# EAGLE board Temperatura y humedadALIM (EAGLE 7.6.0)
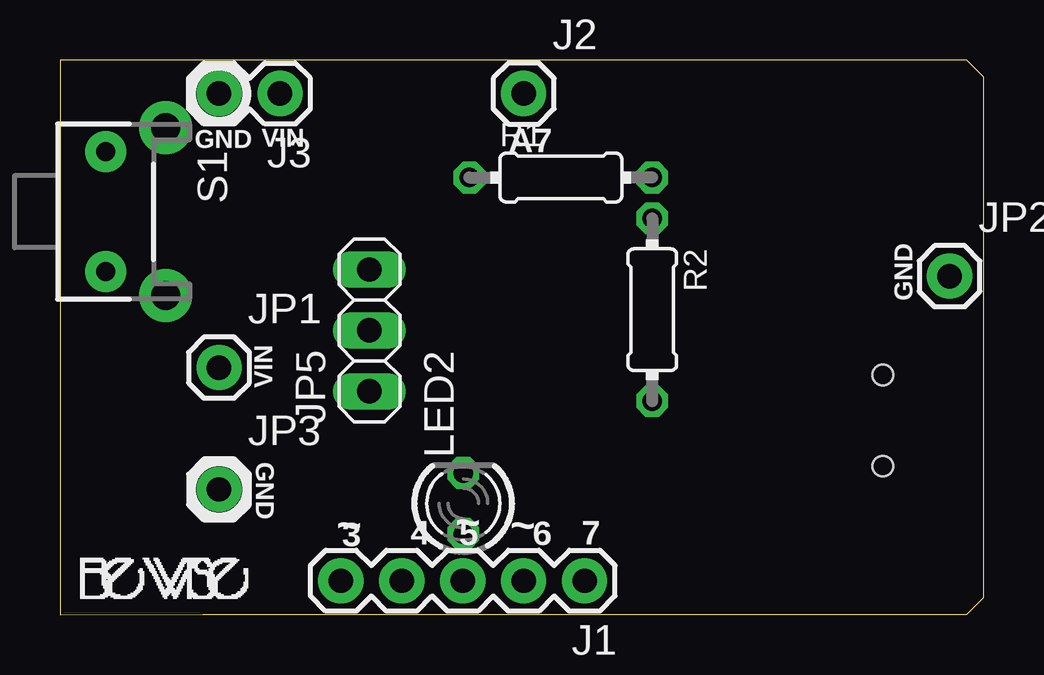
[diagram p0: board, top side]
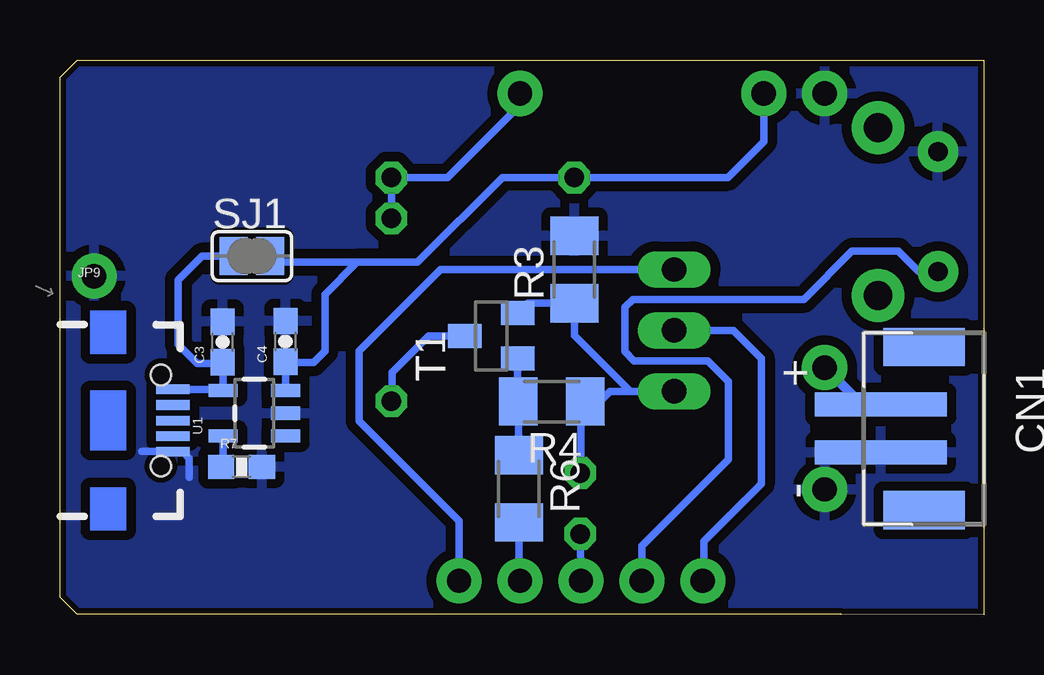
[diagram p1: board, bottom side, seen from below]

Size 38.51 x 23.14 mm. Coordinates in mm from the lower left corner, seen from the top.
Outline: 5.94,0.02 37.79,0.02 38.51,0.74 38.51,22.43 37.79,23.14 0,23.14 0,0 5.94,0.02
Copper layers (1*16): Top 0.035mm / dielectric 1.5mm / Bottom 0.035mm
Design rules "ITEADstudio_DRC *": minimum track width 6mil, minimum drill 12mil, track to track 16mil, track to pad 16mil, pad to pad 6mil, via to via 6mil, smd to smd 6mil, copper to edge 10mil, drill to drill 10mil, minimum pad ring 10mil, minimum via ring 6mil, stop-mask expansion 2mil, vias tented up to drill 100mil, thermal gap 15mil
Net classes: 1 power: width 0.381 mm, clearance 0.254 mm

## Footprints (pad centres in the part's own frame; a part is rotated, then mirrored left to right if it is on the bottom)
0603-CAP = smd 1.1 x 1: 1 -0.85,0; 2 0.85,0
JST-PH-2-SMT = smd 1 x 5.5: 1 -1,-1.8; 2 1,-1.8 | smd 1.6 x 3.4: NC1 -3.4,0; NC2 3.4,0
1X05 = drill 1.016 pad 1.88: 1 0,0; 2 2.54,0; 3 5.08,0; 4 7.62,0; 5 10.16,0
1X01 = drill 1.016 pad 1.88: 1 0,0
1X02 = drill 1.016 pad 1.88: 1 0,0; 2 2.54,0
1X03 = drill 1.016 long: 1 -2.54,0; 2 0,0; 3 2.54,0
USB-AB-MICRO-SMD_V03 = smd 1.4 x 0.4: D+1 2.7,0; D-1 2.7,0.65; GND1 2.7,-1.3; ID1 2.7,-0.65; VBUS1 2.7,1.3 | hole 0.85: 2.2,1.9; 2.2,-1.9
LED3MM = drill 0.813 octagon: A -1.27,0; K 1.27,0
0204/7 = drill 0.813 octagon: 1 -3.81,0; 2 3.81,0
M1206 = smd 1.6 x 2: 1 -1.4,0; 2 1.4,0
0603-RES = smd 1.1 x 1: 1 -0.85,0; 2 0.85,0
TACTILE-PTH-SIDEEZ = drill 0.8 pad 1.7: 1 -2.5,0; 2 2.5,0 | drill 1.2 pad 2.2: ANCHOR1 -3.5,2.5; ANCHOR2 3.5,2.5
SJ = smd 1.168 x 1.6: 1 -0.762,0; 2 0.762,0
SOT23 = smd 1 x 1.4: 1 -0.95,-1.1; 2 0.95,-1.1; 3 0,1.1
SOT23-5 = smd 0.55 x 1.2: 1 -0.95,-1.3; 2 0,-1.3; 3 0.95,-1.3; 4 0.95,1.3; 5 -0.95,1.3

## Placement (x,y rotation side)
C3  4.7uF  [0603-CAP]  31.72,11.38 90 bottom
C4  4.7uF  [0603-CAP]  29.11,11.4 90 bottom
CN1  [JST-PH-2-SMT]  2.49,7.77 270 bottom
J1  [1X05]  21.87,1.42 180 top
J2  [1X01]  19.33,21.74 0 top
J3  [1X02]  9.17,21.74 180 top
JP1  [1X01]  6.63,10.31 0 top
JP2  [1X01]  37.08,14.12 0 top
JP3  [1X01]  6.63,5.23 0 top
JP5  [1X03]  12.9,11.86 90 top
JP9  Micro USB  [USB-AB-MICRO-SMD_V03]  36.5,8.1 0 bottom
LED2  [LED3MM]  16.81,4.65 90 top
R1  [0204/7]  20.88,18.24 0 top
R2  [0204/7]  24.69,12.73 270 top
R3  [M1206]  17.07,14.4 90 bottom
R4  [M1206]  18.01,8.89 180 bottom
R6  [M1206]  19.38,5.26 270 bottom
R7  2.0k  [0603-RES]  30.94,6.17 0 bottom
S1  SWITCH-MOMENTARY-2SIDE_EZ  [TACTILE-PTH-SIDEEZ]  1.91,16.81 270 top
SJ1  [SJ]  30.51,14.96 0 bottom
T1  BC850  [SOT23]  20.52,11.63 90 bottom
U1  MCP73831  [SOT23-5]  30.4,8.41 90 bottom

## Library data of the parts
C3 C4 = SparkFun-Capacitors; PROD_ID: CAP-08280
CN1 = adafruit
J1-J3 JP1-JP3 = SparkFun-Connectors
JP5 = pinhead
JP9 = SparkFun-Connectors; PROD_ID: CONN-11794
LED2 = led
R1-R4 R6 = rcl
R7 = SparkFun-Resistors; PROD_ID: RES-08296
S1 = SparkFun-Electromechanical
SJ1 = jumper
T1 = transistor
U1 = SparkFun-PowerIC; PROD_ID: IC-09995

## Nets
AGND [power]: CN1.2 JP3.1
GND [power]: J3.2 R3.2 S1.1
GND1 [power]: C3.2 C4.2 JP2.1 JP9.GND1 R7.2 U1.2
N$1: J1.4 S1.2
N$2: J1.5 JP5.2
N$3: J1.1 JP5.3
N$4 [power]: JP5.1 LED2.K R3.1 R4.1 T1.2
N$5: C3.1 JP9.VBUS1 SJ1.1 U1.4
N$6: J2.1 R1.2 R2.1
N$7: R2.2 T1.3
N$8: R4.2 R6.1 T1.1
N$9: J1.2 R6.2
N$10: J1.3 LED2.A
PROG: R7.1 U1.5
VCC: CN1.1 JP1.1
VIN: C4.1 J3.1 R1.1 SJ1.2 U1.3

## Tracks (layer width: path | path; a pad name or v marks a point on that pad's centre or on a via)
AGND
  pour Bottom: 4.98,22.94 38.35,22.94 38.38,0.23 0.2,0.18 0.2,22.96
GND
  pour Bottom: 0.15,22.99 38.3,22.89 38.3,0.25 0.18,0.2
GND1
  Bottom 0.305: JP9.GND1 | JP9.GND1 35.1,6.81 | JP9.GND1 33.4,6.81 33.12,6.53 33.12,5.74
  pour Bottom: 0.2,22.96 38.35,22.91 38.35,0.15 0.2,0.2
N$1
  Bottom 0.305: S1.2 2.71,14.31 3.56,15.16 5.49,15.16 7.49,13.16 14.63,13.16 14.96,12.83 14.96,10.97 14.58,10.59 11.51,10.59 10.64,9.73 10.64,6.48 14.25,2.87 J1.4
N$2
  Bottom 0.305: JP5.2 10.44,11.86 9.27,10.69 9.27,5.46 11.66,3.07 11.66,1.47 J1.5
N$3
  Bottom 0.305: JP5.3 22.63,14.4 26.03,11 26.03,8.08 21.87,3.91 J1.1 | 21.84,1.45 J1.1 | 21.87,1.91 J1.1
N$4
  Bottom 0.305: JP5.1 14.73,9.32 | 14.73,9.32 15.57,9.32 16.61,8.28 | LED2.K 16.79,5.94 16.79,8.1 16.61,8.28 | 14.73,9.32 17.07,11.66 R3.1 19,13 T1.2 | R4.1 16.61,8.28
N$5
  Bottom 0.305: JP9.VBUS1 31.75,9.4 U1.4 31.7,10.51 C3.1 31.76,10.49 32.79,10.49 33.58,11.28 33.58,13.97 32.59,14.96 SJ1.1
N$6
  Bottom 0.305: J2.1 19.33,21.26 22.35,18.24 R1.2 R2.1
N$7
  Bottom 0.305: T1.3 23.14,11.63 24.66,10.11 24.66,8.94 R2.2
N$8
  Bottom 0.305: T1.1 R4.2 R6.1
N$9
  Bottom 0.305: R6.2 19.38,1.47 J1.2
N$10
  Bottom 0.305: LED2.A J1.3
PROG
  Bottom 0.305: U1.5 31.7,5.88 R7.1
VCC
  Bottom 0.406: CN1.1 5.09,8.77 JP1.1
VIN
  Bottom 0.305: U1.3 C4.1 29.07,10.52 27.94,10.52 27.46,11 27.46,13.36 26.11,14.71 | 26.11,14.71 23.6,14.71 20.07,18.24 R1.1 10.67,18.24 9.17,19.74 J3.1 | SJ1.2 29.49,14.71 26.11,14.71

## Text on the board
_tsilk: GND | VIN | A7 | GND | VIN | GND | 3 | 4 | 5 | 6 | 7 | ~ | ~ | ~